# EAGLE board Adafruit Feather nRF52840 Rev D (EAGLE 9.2.0)
REV: D
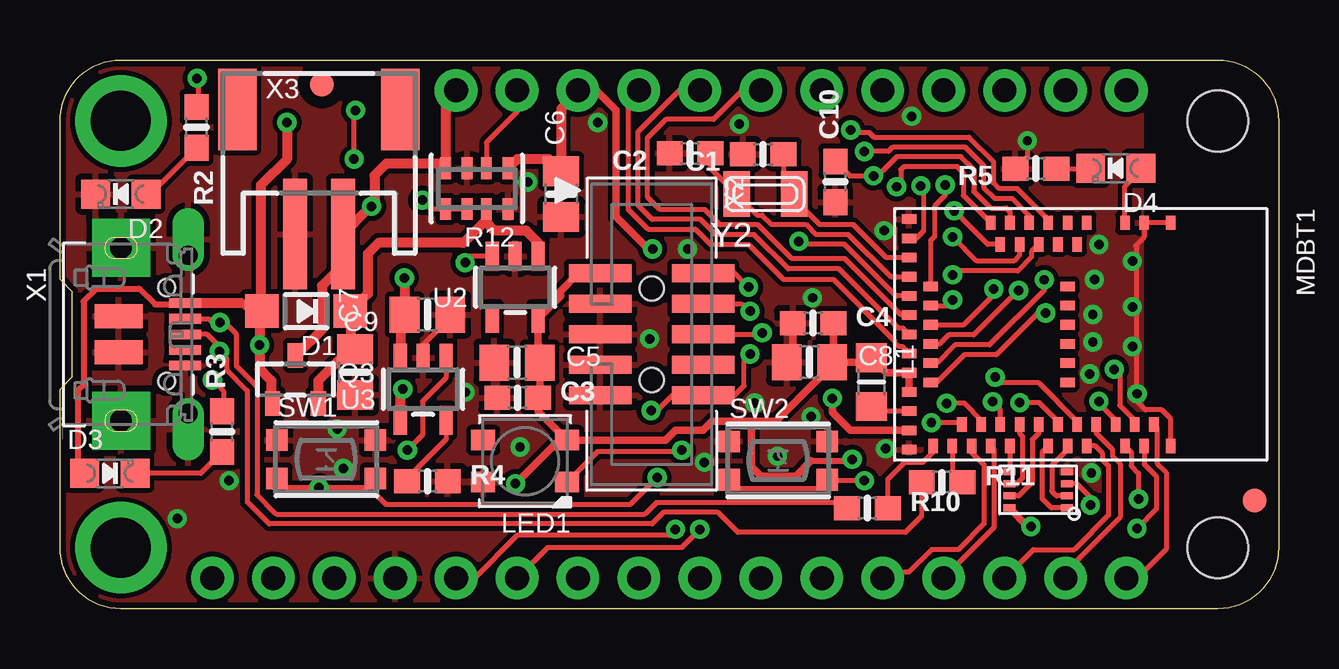
[diagram p0: board, top side]
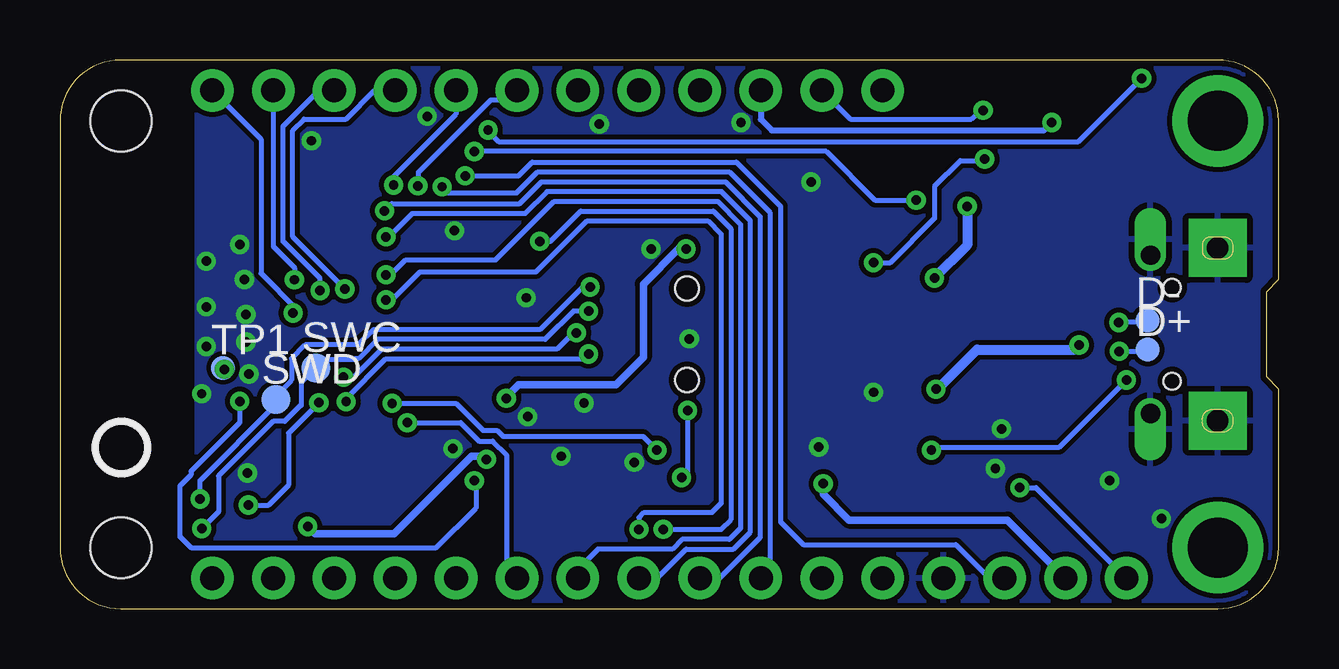
[diagram p1: board, bottom side, seen from below]

Size 50.8 x 22.86 mm. Coordinates in mm from the lower left corner, seen from the top.
Outline: 2.54,22.86 48.26,22.86 arc-90 50.8,20.32 50.8,2.54 arc-90 48.26,0 2.54,0 arc-90 0,2.54 0,9.14 0.51,9.65 0.51,13.21 0,13.72 0,20.32 arc-90 2.54,22.86
Copper layers (1+2*15+16): Top 0.035mm / dielectric 0.2mm / Route2 0.035mm / dielectric 1.45mm / Route15 0.035mm / dielectric 0.2mm / Bottom 0.035mm
Design rules "adafruit_4layer *": minimum track width 8mil, minimum drill 15.5mil, track to track 8mil, track to pad 8mil, pad to pad 8mil, via to via 8mil, smd to smd 8mil, copper to edge 10mil, drill to drill 8mil, minimum pad ring 10mil, minimum via ring 8mil, stop-mask expansion 2mil, vias tented up to drill 20mil, thermal gap 10mil
Net classes: 1 power: width 0.254 mm

## Footprints (pad centres in the part's own frame; a part is rotated, then mirrored left to right if it is on the bottom)
0603-NO = smd 1.075 x 1: 1 -0.85,0; 2 0.85,0
0805-NO = smd 1.24 x 1.5: 1 -0.95,0; 2 0.95,0
SOD-123 = smd 1.4 x 1.4: A 1.85,0; C -1.85,0
CHIPLED_0805_NOOUTLINE = smd 1.2 x 1.2: A 0,-1.05; C 0,1.05
TP10R = smd 1 x 1: TP 0,0
FIDUCIAL_1MM = smd 1 x 1: 1 0,0
USON8 = smd 0.5 x 0.275: 1 -1.2,0.75; 2 -1.2,0.25; 3 -1.2,-0.25; 4 -1.2,-0.75; 5 1.2,-0.75; 6 1.2,-0.25; 7 1.2,0.25; 8 1.2,0.75
_0805MP = smd 1.2 x 1.3: 1 -1.016,0; 2 1.016,0
LED3535 = smd 1 x 0.85: 1 -1.75,0.875; 2 -1.75,-0.875; 3 1.75,-0.875; 4 1.75,0.875
MDBT50 = smd 0.6 x 0.4: 1 -4.65,3.75; 2 -4.65,2.65; 3 -4.65,1.85; 4 -4.65,0.25; 5 -3.75,-0.15; 6 -4.65,-0.55; 7 -3.75,-0.95; 8 -4.65,-1.35; 9 -3.75,-1.75; 10 -4.65,-2.15; 11 -3.75,-2.55; 12 -4.65,-2.95; 13 -3.75,-3.35; 14 -4.65,-3.75; 34 4.65,-6.15; 35 4.65,-5.35; 36 3.75,-4.95; 37 4.65,-4.55; 38 3.75,-4.15; 39 4.65,-3.75; 40 3.75,-3.35; 41 4.65,-2.95; 42 3.75,-2.55; 43 3.75,-1.75; 44 4.65,-1.35; 45 3.75,-0.95; 46 4.65,-0.55; 47 3.75,-0.15; 48 4.65,0.25; 49 3.75,0.65; 50 3.75,1.45; 51 4.65,1.85; 52 3.75,2.25; 53 4.65,2.65; 54 3.75,3.05; 55 4.65,3.75 | smd 0.4 x 0.6: 15 -4.8,-7.15; 16 -4,-7.15; 17 -3.2,-7.15; 18 -2.4,-7.15; 19 -2,-6.25; 20 -1.6,-7.15; 21 -1.2,-6.25; 22 -0.8,-7.15; 23 -0.4,-6.25; 24 0,-7.15; 25 0.4,-6.25; 26 0.8,-7.15; 27 1.2,-6.25; 28 1.6,-7.15; 29 2,-6.25; 30 2.4,-7.15; 31 3.2,-7.15; 32 4,-7.15; 33 4.8,-7.15; 56 -2,-0.55; 57 -1.2,-0.55; 58 -0.4,-0.55; 59 0.4,-0.55; 60 1.2,-0.55; 61 2,-0.55
FEATHERWING_NODIM = drill 1 pad 1.778: 1 6.35,1.27; 2 8.89,1.27; 3 11.43,1.27; 4 13.97,1.27; 5 16.51,1.27; 6 19.05,1.27; 7 21.59,1.27; 8 24.13,1.27; 9 26.67,1.27; 10 29.21,1.27; 11 31.75,1.27; 12 34.29,1.27; 13 36.83,1.27; 14 39.37,1.27; 15 41.91,1.27; 16 44.45,1.27; 17 44.45,21.59; 18 41.91,21.59; 19 39.37,21.59; 20 36.83,21.59; 21 34.29,21.59; 22 31.75,21.59; 23 29.21,21.59; 24 26.67,21.59; 25 24.13,21.59; 26 21.59,21.59; 27 19.05,21.59; 28 16.51,21.59 | drill 2.5 pad 3.81: P$1 2.54,20.32; P$2 2.54,2.54 | hole 2.54: 48.26,20.32; 48.26,2.54
SOT23-R = smd 0.635 x 1.016: 1 -0.95,-1; 2 0.95,-1; 3 0,1
RESPACK_4X0603 = smd 0.45 x 0.9: 1 -1.3,-0.85; 2 -0.4,-0.85; 3 0.4,-0.85; 4 1.3,-0.85; 5 1.3,0.85; 6 0.4,0.85; 7 -0.4,0.85; 8 -1.3,0.85
BTN_KMR2_4.6X2.8 = smd 0.9 x 0.9: A 2.05,0.8; A' -2.05,0.8; B 2.05,-0.8; B' -2.05,-0.8
TP12R = smd 1.2 x 1.2: TP 0,0
SOT23-5 = smd 0.55 x 1.2: 1 -0.95,-1.3; 2 0,-1.3; 3 0.95,-1.3; 4 0.95,1.3; 5 -0.95,1.3
4UCONN_20329_V2 = smd 1 x 2: BASE@1 -0.75,-2; BASE@2 0.75,-2 | smd 0.4 x 1.35: D+ 0,0.775; D- -0.65,0.775; GND 1.3,0.775; ID 0.65,0.775; VBUS -1.3,0.775 | drill 0.8 pad 1.143 offset: SPRT@1 -3.3,0.9; SPRT@2 3.3,0.9 | drill 0.9 pad 2.413 square: SPRT@3 -3.6,-1.9; SPRT@4 3.6,-1.9 | hole 0.7: -1.95,0; 1.95,0
2X05_1.27MM_BOX_POSTS = smd 0.76 x 2.6: 1 -2.54,-2.15; 2 -2.54,2.15; 3 -1.27,-2.15; 4 -1.27,2.15; 5 0,-2.15; 6 0,2.15; 7 1.27,-2.15; 8 1.27,2.15; 9 2.54,-2.15; 10 2.54,2.15 | hole 1: -1.905,0; 1.905,0
JSTPH2 = smd 1 x 4.6: 1 -1,-3.7; 2 1,-3.7 | smd 1.6 x 3.4: NC1 -3.4,1.5; NC2 3.4,1.5
XTAL3215 = smd 1.1 x 1.9: P$1 1.2,0; P$2 -1.2,0

## Placement (x,y rotation side)
C1  22pF  [0603-NO]  29.31,18.94 180 top
C2  22pF  [0603-NO]  26.26,18.97 180 top
C3  0.1uF  [0603-NO]  19.08,8.79 0 top
C4  0.1uF  [0603-NO]  31.39,11.9 0 top
C5  10uF  [0805-NO]  19.05,10.25 0 top
C6  10uF  [0805-NO]  20.89,17.27 90 top
C7  10uF  [0805-NO]  12.29,9.86 90 top
C8  10uF  [0805-NO]  31.24,10.27 0 top
C9  10uF  [0805-NO]  15.32,12.26 180 top
C10  0.1uF  [0603-NO]  32.32,17.78 90 top
D1  MBR120  [SOD-123]  10.26,12.4 180 top
D2  RED  [CHIPLED_0805_NOOUTLINE]  2.54,17.27 90 top
D3  ORANGE  [CHIPLED_0805_NOOUTLINE]  2.08,5.64 270 top
D4  BLUE  [CHIPLED_0805_NOOUTLINE]  44.01,18.35 90 top
D+  TPTP10R  [TP10R]  5.46,10.79 0 bottom
D-  TPTP10R  [TP10R]  5.46,12 0 bottom
FID1  FIDUCIAL_1MM  [FIDUCIAL_1MM]  10.92,21.84 0 top
FID2  FIDUCIAL_1MM  [FIDUCIAL_1MM]  49.78,4.51 0 top
IC2  GD25Q16  [USON8]  40.77,4.95 180 top
L1  DNP  [_0805MP]  33.82,9.44 270 top
LED1  WS2812B3535  [LED3535]  19.39,6.15 180 top
MDBT1  MDBT50  [MDBT50]  42.55,11.43 270 top
MS1  FEATHERWING_NODIM  [FEATHERWING_NODIM]  0,0 0 top
Q3  DMG2305  [SOT23-R]  9.82,9.55 0 top
R2  1K  [0603-NO]  5.69,20.05 270 top
R3  1K  [0603-NO]  6.76,7.38 90 top
R4  4.7K  [0603-NO]  15.32,5.31 0 top
R5  1K  [0603-NO]  40.68,18.34 180 top
R10  22  [0603-NO]  33.66,4.19 0 top
R11  22  [0603-NO]  36.77,5.27 0 top
R12  100K  [RESPACK_4X0603]  17.37,17.5 180 top
SW1  KMR2  [BTN_KMR2_4.6X2.8]  11.1,6.22 0 top
SW2  KMR2  [BTN_KMR2_4.6X2.8]  29.93,6.17 0 top
SWC  TPTP12R  [TP12R]  40.13,10.03 0 bottom
SWD  TPTP12R  [TP12R]  41.81,8.71 0 bottom
TP1  TPTP10R  [TP10R]  44.01,10.03 0 bottom
U2  AP2112(3.3V)  [SOT23-5]  18.97,13.39 180 top
U3  MCP73831T-2ACI/OT  [SOT23-5]  15.14,9.14 180 top
U$10  [PCBFEAT-REV-056]  48.24,6.72 0 bottom
U$12  [NRF52840_BOT]  50.8,0 0 bottom
U$14  [NRF52840_TOP]  0,0 0 top
X1  4u20329  [4UCONN_20329_V2]  4.45,11.43 270 top
X2  2x5 0.05"  [2X05_1.27MM_BOX_POSTS]  24.66,11.43 270 top
X3  JSTPH  [JSTPH2]  10.79,19.3 0 top
Y2  32.768  [XTAL3215]  29.4,17.27 0 top

## Library data of the parts
C1-C10 D1-D4 IC2 L1 LED1 MDBT1 MS1 Q3 R2-R5 R10-R12 SW1 SW2 U2 U3 U$10 X1-X3 = microbuilder
D+ D- SWC SWD TP1 = testpad
FID1 FID2 = microbuilder; BOM: EXCLUDE
U$12 U$14 = feather_silks
Y2 = adafruit2

## Nets
3.3V [power]: C3.2 C4.2 C5.2 C8.2 IC2.8 L1.1 LED1.2 MDBT1.28 MDBT1.30 MS1.2 U2.5 X2.1
A0: MDBT1.20 MS1.5
A1: MDBT1.21 MS1.6
A2: MDBT1.14 MS1.7
A3: MDBT1.13 MS1.8
A4: MDBT1.11 MS1.9
A5: MDBT1.9 MS1.10
AREF: C10.2 MDBT1.12 MS1.3
D2: MDBT1.54 MS1.16
D5: MDBT1.25 MS1.19
D6: MDBT1.23 MS1.20
D9: MDBT1.19 MS1.21
D10: MDBT1.16 MS1.22
D11: MDBT1.22 MS1.23
D12: MDBT1.24 MS1.24
D13: MDBT1.26 MS1.25
D+: D+.TP R11.1 X1.D+
D-: D-.TP R10.1 X1.D-
DCCH: L1.2 MDBT1.31
EN: MS1.27 R12.2 U2.3
GND: C1.2 C2.2 C3.1 C4.1 C5.1 C6.1 C7.1 C8.1 C9.1 C10.1 D2.C IC2.4 LED1.4 MDBT1.1 MDBT1.2 MDBT1.15 MDBT1.33 MDBT1.55 MS1.4 R4.2 R5.2 R12.3 R12.8 SW1.A SW1.A' SW2.A SW2.A' U2.2 U3.2 X1.BASE@1 X1.BASE@2 X1.GND X1.SPRT@1 X1.SPRT@2 X1.SPRT@3 X1.SPRT@4 X2.3 X2.5 X2.7 X2.9 X3.1
LED1: MDBT1.8 R2.1
LED2: D4.A MDBT1.3
MISO: MDBT1.39 MS1.13
MOSI: MDBT1.37 MS1.12
N$1: D3.C R3.1
N$5: D2.A R2.2
N$7: C1.1 MDBT1.17 Y2.P$1
N$8: C2.1 MDBT1.18 Y2.P$2
N$11: R3.2 U3.1
N$12: R4.1 U3.5
N$14: D4.C R5.1
NEOPIX: LED1.1 MDBT1.38
NFC2: MDBT1.52 TP1.TP
QSPI_CS: IC2.1 MDBT1.44
QSPI_DATA0: IC2.5 MDBT1.41
QSPI_DATA1: IC2.2 MDBT1.46
QSPI_DATA2: IC2.3 MDBT1.45
QSPI_DATA3: IC2.7 MDBT1.43
QSPI_SCK: IC2.6 MDBT1.42
RESET: MDBT1.40 MS1.1 SW1.B SW1.B' X2.10
RXD: MDBT1.48 MS1.14
SCK: MDBT1.36 MS1.11
SCL: MDBT1.27 MS1.18
SDA: MDBT1.29 MS1.17
SWCLK: MDBT1.53 SWC.TP X2.4
SWDIO: MDBT1.51 SWD.TP X2.2
SWITCH: MDBT1.50 SW2.B SW2.B'
SWO: MDBT1.47 X2.6
TXD: MDBT1.49 MS1.15
USBD+: MDBT1.35 R11.2
USBD-: MDBT1.34 R10.2
VBAT [power]: C9.2 MS1.28 Q3.3 R12.4 U3.3 X3.2
VBUS [power]: C6.2 D1.A D3.A MDBT1.32 MS1.26 Q3.1 R12.1 U3.4 X1.VBUS
VDIV: MDBT1.10 R12.5 R12.6
VHI [power]: C7.2 D1.C Q3.2 R12.7 U2.1

## Tracks (layer width: path | path; a pad name or v marks a point on that pad's centre or on a via)
3.3V  (via drill 0.39)
  Top 0.254: 31.31,6.16 32.96,6.16 v33.02,6.22
  Top 0.305: 20.34,10.59 19.92,11 U2.5 20.86,13.02 20.86,13.23 21.6,13.97 X2.1 | MDBT1.30 MDBT1.28 34.44,9.83 L1.1 33.64,10.27 C8.2 | C8.2 32.24,10.33 C4.2 | LED1.2 25.25,7.02 25.65,7.43 26.8,7.43 27.18,7.81 28.83,7.81 | C8.2 32.19,10.16 29.84,7.81 28.83,7.81 | 31.31,6.16 30.67,5.52 29.21,5.52 28.83,5.91 28.83,7.81 | v18.99,5.21 20.97,7.19 19.93,8.23 C3.2 20,8.86 C5.2 | IC2.8 40.35,3.42 v40.47,3.42
  Top 0.406: 20.34,10.59 C5.2 | LED1.2 20.97,7.19
  Bottom 0.305: v40.47,3.42 40.16,3.11 36.87,3.11 33.63,6.35 33.15,6.35 v33.02,6.22 | MS1.2 11.3,3.68 17.91,3.68 18.99,4.76 v18.99,5.21
A0  (via drill 0.39)
  Top 0.203: MDBT1.20 34.85,13.03 32.71,15.18 30.92,15.18 v30.8,15.3 | v25.65,3.3 25.4,3.05 19.05,3.05 17.27,1.27 MS1.5
  Bottom 0.203: v30.8,15.3 30.35,15.3 29.1,16.56 23.56,16.56 22.84,15.84 22.84,3.71 23.24,3.3 v25.65,3.3
A1  (via drill 0.39)
  Top 0.203: MDBT1.21 36.98,12.63 v37.21,12.87 | MS1.6 20.32,2.54 25.91,2.54 v26.67,3.3
  Bottom 0.203: v26.67,3.3 26.67,3.79 26.45,4.01 23.62,4.01 23.24,4.38 23.24,15.6 23.79,16.15 28.83,16.15 30.96,14.03 35.8,14.03 36.96,12.87 v37.21,12.87
A2  (via drill 0.39)
  Top 0.203: v34.87,17.58 35.05,17.76 35.05,18.29 35.19,18.43 37.39,18.43 37.66,18.16 37.66,17.22 MDBT1.14
  Bottom 0.203: v34.87,17.58 34.62,17.32 31.76,17.32 30.89,18.2 22.9,18.2 21.21,16.51 21.21,1.65 MS1.7
A3  (via drill 0.39)
  Top 0.203: MDBT1.13 38.67,15.18 v37.27,16.57
  Bottom 0.203: v37.27,16.57 36.97,16.87 31.64,16.87 30.73,17.78 23.06,17.78 21.61,16.34 21.61,2.96 23.3,1.27 MS1.8
A4  (via drill 0.39)
  Top 0.203: MDBT1.11 39.99,14.72 39.75,14.48 38.23,14.48 v37.21,15.49
  Bottom 0.203: v37.21,15.49 37.08,15.49 36.11,16.47 31.41,16.47 30.5,17.37 23.23,17.37 22.02,16.17 22.02,3.19 22.73,2.48 24.7,2.48 25.91,1.27 MS1.9
A5  (via drill 0.39)
  Top 0.203: MDBT1.9 40.5,14.88 40.5,14.65 39.92,14.07 37.38,14.07 v37.21,13.91
  Bottom 0.203: v37.21,13.91 37.02,13.91 36.39,14.54 32.63,14.54 30.2,16.97 23.39,16.97 22.43,16 22.43,3.36 22.9,2.88 24.87,2.88 25.27,2.48 28.38,2.48 29.21,1.65 MS1.10
AREF  (via drill 0.39)
  Top 0.203: C10.2 32.92,18.03 v33.91,18.03 34.09,18.03 34.9,18.83 37.56,18.83 38.09,18.3 38.09,17.39 38.8,16.68 39.45,16.68 39.59,16.54 MDBT1.12
  Bottom 0.203: v33.91,18.03 31.69,18.03 31.11,18.61 22.61,18.61 20.77,16.76 20.77,3.62 19.81,2.67 13.46,2.67 12.06,1.27 MS1.3
D2
  Top 0.203: MDBT1.54 45.72,7.55 45.72,6.07 46.11,5.68 46.11,2.48 44.9,1.27 MS1.16
D5  (via drill 0.39)
  Top 0.203: MDBT1.25 36.68,11.03 37.06,11.41 38.08,11.41 39.92,13.25 v39.96,13.25
  Bottom 0.203: v39.96,13.25 39.96,13.76 41.5,15.3 41.5,20.09 40.01,21.59 MS1.19
D6  (via drill 0.39)
  Top 0.203: MDBT1.23 37.69,11.83 38.92,13.07 v38.92,13.32
  Bottom 0.203: v38.92,13.32 41.1,15.49 41.1,19.92 40.62,20.4 38.88,20.4 37.68,21.59 MS1.20
D9  (via drill 0.39)
  Top 0.203: MDBT1.19 36.3,15.34 36.45,15.49 36.45,16.76 36.89,17.21 v36.89,17.65
  Bottom 0.203: MS1.21 34.29,20.6 36.89,18 v36.89,17.65
D10  (via drill 0.39)
  Top 0.203: MDBT1.16 35.7,15.43 36,15.72 36,17.5 v35.88,17.61
  Bottom 0.203: v35.88,17.61 35.86,17.63 35.86,18.17 32.84,21.2 32.14,21.2 MS1.22
D11
  Top 0.203: MDBT1.22 35.08,12.23 32.73,14.58 30.51,14.58 29.1,15.99 27.51,15.99 26.88,16.62 25.02,16.62 24.5,17.14 24.5,19.62 25.26,20.38 27.24,20.38 28.45,21.59 MS1.23
D12
  Top 0.203: MDBT1.24 35.14,11.68 34.95,11.68 32.47,14.16 30.36,14.16 28.93,15.58 27.34,15.58 26.71,16.22 24.68,16.22 24.09,16.8 24.09,19.86 25.82,21.59 MS1.24
D13
  Top 0.203: MS1.25 23.69,21.14 23.69,16.64 24.51,15.81 26.48,15.81 27.11,15.18 28.7,15.18 30.16,13.72 32.24,13.72 34.79,11.17 34.79,11.1 34.97,10.93 35.1,10.93 MDBT1.26
D+  (via drill 0.39)
  Top 0.203: X1.D+ 6.13,11.43 6.76,10.8 6.76,10.61 | v6.65,10.72 6.76,10.61 | 6.76,10.61 6.95,10.42 6.95,9.94 7.81,9.08 7.81,4.45 8.72,3.53 24.68,3.53 25.16,4.01 27.43,4.01 28.26,3.17 35.24,3.17 35.92,3.85 R11.1
  Bottom 0.203: v6.65,10.72 5.54,10.72 D+.TP
D-  (via drill 0.39)
  Top 0.203: X1.D- 5.24,12.06 6.21,12.06 6.34,11.94 | 6.34,11.94 6.86,11.94 7.35,11.45 7.35,10.11 8.22,9.25 8.22,4.74 9.02,3.94 24.38,3.94 24.86,4.41 32.58,4.41 R10.1 | v6.67,11.92 6.35,11.92 6.34,11.94
  Bottom 0.203: D-.TP 5.54,11.92 v6.67,11.92
DCCH
  Top 0.203: MDBT1.31 34.01,8.23 L1.2
EN  (via drill 0.39)
  Top 0.203: MS1.27 19.05,20.7 17.77,19.43 R12.2 | U2.3 16.89,14.69 v16.89,14.41 | v12.26,18.73 12.26,20.7 v12.32,20.77
  Bottom 0.203: v16.89,14.41 16.19,14.41 14.35,16.26 14.35,17.59 13.27,18.67 12.32,18.67 v12.26,18.73 | v12.32,20.77 12.45,20.77 12.81,20.4 17.86,20.4 MS1.27
GND  (via drill 0.39)
  Top 0.203: U3.2 15.14,11 16.27,12.13 C9.1 | MDBT1.1 MDBT1.2 45.2,15.48 44.83,15.11 44.9,15.05 44.9,8.64 45.25,8.29 45.92,8.29 46.3,7.91 MDBT1.55 | v40.32,19.49 40.32,18.83 R5.2
  Top 0.305: C8.1 30.54,10.53 C4.1
  other vias: 11.56,7.49 19.18,6.73 16.89,9.02 31.37,12.95 19.49,17.78 26.16,14.99 28.32,20.19 22.42,20.26 34.35,15.75 42.99,5.65 34.42,6.67 29.91,6.35 28.96,8.57 24.57,11.24 44.7,10.92 44.7,12.57 44.7,14.48 43.31,15.18 43.12,13.72 43.05,12.26 42.93,9.78 43.05,11.11 44.89,8.95 4.89,3.75 7.05,5.33 26.86,6.1 35.5,20.51 11.81,5.84 31.31,8
  pour Top: 0,0 45.09,0 45.09,22.86 0,22.86
  pour Bottom: 0,0 45.09,0 45.09,22.86 0,22.86
LED1  (via drill 0.39)
  Top 0.203: v32.96,19.95 33.07,19.84 33.74,19.84 33.93,19.65 37.9,19.65 38.91,18.64 38.91,17.74 39.14,17.5 39.91,17.5 41.09,16.32 41.09,16.09 41.1,16.08 MDBT1.8 | v5.71,22.1 5.75,22.06 5.75,20.97 R2.1
  Bottom 0.203: v32.96,19.95 32.96,19.9 32.51,19.46 8.36,19.46 v5.71,22.1
LED2
  Top 0.203: MDBT1.3 44.4,17.59 45.06,18.25 D4.A
MISO
  Top 0.203: MDBT1.39 38.92,6.65 38.92,3.36 MS1.13
MOSI
  Top 0.203: MS1.12 34.04,1.52 35.4,1.52 36.34,2.46 37.45,2.46 38.52,3.53 38.52,6 37.99,6.52 MDBT1.37
N$1
  Top 0.203: R3.1 5.87,5.64 D3.C
N$5
  Top 0.203: D2.A 3.76,17.27 R2.2
N$7
  Top 0.203: MDBT1.17 34.44,14.63 33.07,16 31.67,16 30.48,17.2 30.48,17.4 | C1.1 30.16,17.71 30.48,17.4 | 30.48,17.4 Y2.P$1
N$8
  Top 0.203: MDBT1.18 34.63,13.83 32.87,15.58 31.52,15.58 31.09,16.01 29.66,16.01 29.27,16.4 29.08,16.4 Y2.P$2 27.11,18.36 C2.1
N$11  (via drill 0.39)
  Top 0.203: v6.35,9.53 6.82,9.05 6.82,8.29 R3.2 | v14.48,6.6 15.11,7.24 15.11,8.64 16.09,9.61 U3.1
  Bottom 0.203: v14.48,6.6 14.35,6.73 9.14,6.73 v6.35,9.53
N$12
  Top 0.203: U3.5 16.09,7.06 14.47,5.44 R4.1
N$14
  Top 0.203: R5.1 42.94,18.34 D4.C
NEOPIX  (via drill 0.39)
  Top 0.203: MDBT1.38 38.4,7.88 37.72,8.55 v36.96,8.55 | v25.92,6.6 25.85,6.54 22.41,6.54 LED1.1
  Bottom 0.203: v36.96,8.55 34.3,8.55 33.17,7.43 32.58,7.43 32.33,7.18 26.49,7.18 v25.92,6.6
NFC2  (via drill 0.39)
  Top 0.203: MDBT1.52 44.8,7.84 44.17,8.47 44.17,9.74 v43.94,9.97
  Bottom 0.203: TP1.TP v43.94,9.97
QSPI_CS
  Top 0.203: MDBT1.44 40.94,6.52 40.94,4.59 41.33,4.2 IC2.1
QSPI_DATA0
  Top 0.203: MDBT1.41 39.59,5.73 IC2.5
QSPI_DATA1
  Top 0.203: MDBT1.46 41.99,6.62 41.34,5.97 41.34,4.89 41.53,4.7 IC2.2
QSPI_DATA2  (via drill 0.39)
  Top 0.203: MDBT1.45 41.59,7.81 40.82,8.58 v40.01,8.58 | v42.95,4.32 42.95,4.64 42.38,5.2 IC2.3
  Bottom 0.203: v40.01,8.58 41.27,7.31 41.27,5.14 42.1,4.32 v42.95,4.32
QSPI_DATA3
  Top 0.203: MDBT1.43 40.8,7.31 40.53,7.04 40.53,5.27 39.96,4.7 IC2.7
QSPI_SCK
  Top 0.203: MDBT1.42 39.99,7.31 40.12,7.18 40.12,5.44 39.89,5.2 IC2.6
RESET  (via drill 0.39)
  Top 0.203: MDBT1.40 39.2,8.3 v38.87,8.62 | SW1.B' 9.43,5.04 v10.79,5.04 12.77,5.04 SW1.B 13.15,4.76 13.56,4.34 23.77,4.34 v24.89,5.46 | v24.64,8.26 24.89,8.26 25.53,8.89 X2.10 28.12,8.89 28.51,9.28 28.51,10.29 28.77,10.55 v28.77,10.61
  Bottom 0.203: MS1.1 10.12,5.04 v10.79,5.04 | v24.89,5.46 24.64,5.71 v24.64,8.26 | v38.87,8.62 38.87,8.75 37.22,10.4 28.97,10.4 v28.77,10.61
RXD
  Top 0.203: MS1.14 40.56,2.46 42.27,2.46 43.72,3.91 43.72,5.94 43.47,6.19 43.47,6.47 43.15,6.78 MDBT1.48
SCK  (via drill 0.39)
  Top 0.203: MDBT1.36 37.53,7.75 v36.32,7.75
  Bottom 0.203: v36.32,7.75 34.1,7.75 33.34,6.99 32.77,6.99 32.19,6.41 32.19,1.71 MS1.11
SCL  (via drill 0.39)
  Top 0.203: MDBT1.27 36.55,10.23 37.31,10.99 38.75,10.99 41.03,13.27 v41.03,13.7
  Bottom 0.203: v41.03,13.7 41.03,14.21 41.91,15.09 MS1.18
SDA  (via drill 0.39)
  Top 0.203: MDBT1.29 36.55,9.43 37.69,10.57 39.02,10.57 40.93,12.48 v41.08,12.32
  Bottom 0.203: v41.08,12.32 40.93,12.48 42.42,13.97 42.42,19.56 MS1.17
SWCLK  (via drill 0.39)
  Top 0.203: v28.77,12.39 28.7,12.39 28.4,12.7 X2.4 | MDBT1.53 45.2,6.02 45.7,5.51 45.7,4.15 v44.89,3.34
  Bottom 0.203: v28.77,12.39 29.4,12.39 30.58,11.22 37.56,11.22 38.36,10.41 38.48,10.41 38.51,10.39 39.78,10.39 SWC.TP 40.74,9.42 40.74,8.47 40.77,8.47 41.43,7.81 41.91,7.81 44.19,5.53 44.19,4.04 v44.89,3.34
SWDIO  (via drill 0.39)
  Top 0.203: MDBT1.51 44.65,6.53 44.65,5.96 44.96,5.65 v44.96,4.57 | X2.2 26.69,14.1 28,14.1 v28.7,13.4
  Bottom 0.203: v28.7,13.4 29.02,13.4 30.8,11.62 37.73,11.62 38.36,10.99 40.58,10.99 41.15,10.41 41.15,9.53 41.81,8.87 SWD.TP 41.81,8.49 44.96,5.34 v44.96,4.57
SWITCH  (via drill 0.39)
  Top 0.203: v33.53,5.33 32.02,5.33 SW2.B 31.63,5.02 28.13,5.02 28.13,5.13 SW2.B' | v43.31,8.64 43.31,8.56 43.99,7.87 MDBT1.50
  Bottom 0.203: v33.53,5.33 33.47,5.27 33.47,4.19 35.12,2.54 45.34,2.54 45.79,2.99 45.79,5.12 45.34,5.57 45.34,5.71 43.31,7.75 v43.31,8.64
SWO  (via drill 0.39)
  Top 0.203: MDBT1.47 42.4,7.81 40.8,9.4 39.24,9.4 39,9.64 v38.98,9.64 | v29.27,11.49 29.27,11.56 29.15,11.43 X2.6
  Bottom 0.203: v38.98,9.64 38.56,9.64 37.39,10.81 30.09,10.81 29.4,11.49 v29.27,11.49
TXD
  Top 0.203: MS1.15 41.91,1.52 44.2,3.81 44.2,6.03 43.87,6.36 43.87,6.63 43.2,7.31 MDBT1.49
USBD+
  Top 0.203: MDBT1.35 37.2,5.69 R11.2
USBD-
  Top 0.203: MDBT1.34 36.4,6.53 35.95,6.08 35.19,6.08 34.51,5.4 R10.2
VBAT  (via drill 0.39)
  Top 0.305: v12.99,16.76 12.84,16.62 | 14.37,13.76 v14.35,13.78
  Top 0.406: U3.3 14.19,12.08 C9.2 14.37,13.76 | 12.84,16.62 12.81,16.62 X3.2 11.79,14.34 10.92,13.46 10.92,11.62 9.85,10.55 Q3.3 | MS1.28 16.07,21.15 R12.4 15.88,18.54 13.6,18.54 13.11,18.06 13.11,16.89 v12.99,16.76
  Bottom 0.406: v14.35,13.78 12.99,15.14 v12.99,16.76
VBUS  (via drill 0.39)
  Top 0.254: D1.A 7.9,12.39 7.57,12.73 | X1.VBUS 4.79,12.73 4.74,12.67 3.96,12.67 3.3,13.34 1.52,13.34 0.99,12.8 0.99,9.34 0.76,9.11 0.76,5.91 D3.A | MS1.26 21.59,21.52
  Top 0.305: MS1.26 22.35,21.59 23.18,20.77 23.18,16.32 24.51,14.99 v24.7,14.99 | MDBT1.32 32.96,7.43 32.19,8.19 v32.19,8.76
  Top 0.406: 7.57,12.73 X1.VBUS | 21.59,21.52 20.89,20.83 C6.2 20.38,18.73 19.05,18.73 R12.1 | U3.4 14.19,9.14 v14.29,9.14 | v9.46,20.26 9.46,18.73 8.38,17.65 8.38,12.43 | Q3.1 8.8,8.61 8.8,9.5 8.32,9.99 v8.32,10.99 8.32,12.49 8.38,12.43 | D1.A 8.38,12.43
  Bottom 0.254: MS1.26 21.59,20.38 21.13,19.93 9.79,19.93 v9.46,20.26
  Bottom 0.305: v24.7,14.99 25.02,14.99 26.48,13.53 26.48,10.48 27.62,9.34 31.69,9.34 32.19,8.83 v32.19,8.76
  Bottom 0.406: v14.29,9.14 14.29,9.08 12.57,10.79 8.51,10.79 v8.32,10.99
VDIV  (via drill 0.39)
  Top 0.203: v33.53,19.05 34.54,19.05 34.73,19.24 37.73,19.24 38.5,18.47 38.5,17.56 38.97,17.09 39.7,17.09 40.4,16.4 MDBT1.10 | R12.6 R12.5 15.48,16.65 v15.11,17.02
  Bottom 0.203: v15.11,17.02 16.83,17.02 18.86,19.05 v33.53,19.05
VHI
  Top 0.406: 12.18,10.91 12.11,10.99 D1.C 12.83,13.11 12.83,14.8 13.27,15.24 16.82,15.24 17.71,16.14 | 12.18,10.91 C7.2 | Q3.2 10.77,9.5 12.18,10.91 | R12.7 17.77,16.2 17.71,16.14 | U2.1 19.92,15.26 19.43,15.75 18.1,15.75 17.71,16.14